# EAGLE board uBraids_SE_Assembly_Template (EAGLE 9.5.2)
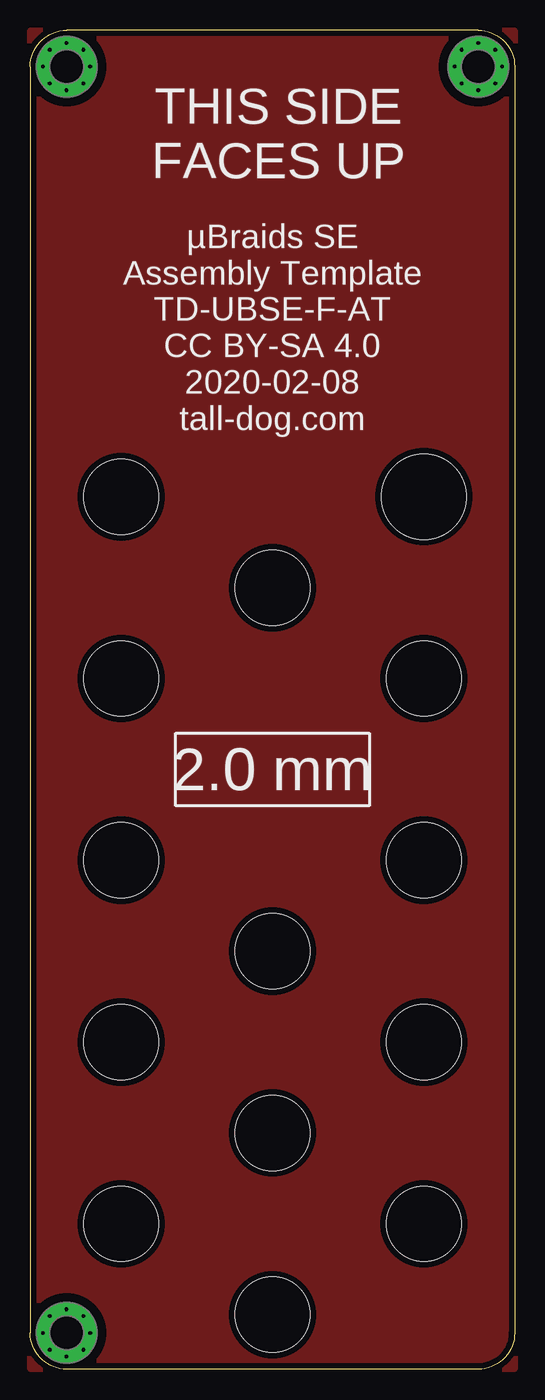
[diagram p0: board, top side]
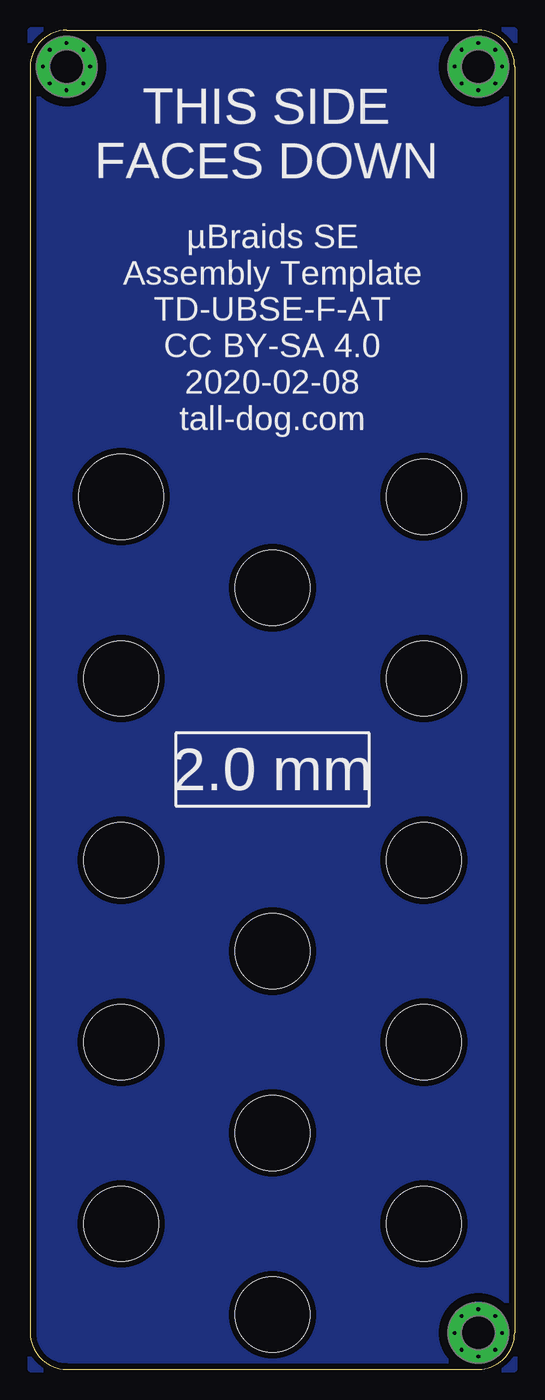
[diagram p1: board, bottom side, seen from below]

Size 40 x 110.5 mm. Coordinates in mm from the lower left corner, seen from the top.
Outline: 37,110.5 3,110.5 arc90 0,107.5 0,3 arc90 3,0 37,0 arc90 40,3 40,107.5 arc90 37,110.5
Copper layers (1*16): Top 0.035mm / dielectric 1.5mm / Bottom 0.035mm
Design rules "default *": minimum track width 10mil, minimum drill 0.25mm, track to track 8mil, track to pad 8mil, pad to pad 8mil, via to via 8mil, smd to smd 8mil, copper to edge 0.25mm, drill to drill 8mil, minimum pad ring 6mil, minimum via ring 6mil, stop-mask expansion 0mil, vias tented up to drill 0mil, thermal gap 10mil
Holes 6.2 mm at 7.5,72 7.5,57 7.5,42 7.5,27 7.5,12 20,64.5 32.5,57 32.5,42 20,34.5 32.5,27 20,19.5 32.5,12 20,4.5
Holes 7 mm at 32.5,72

## Footprints (pad centres in the part's own frame; a part is rotated, then mirrored left to right if it is on the bottom)
M2.5-HOLE = drill 2.75 pad 5: P$1 0,0 | drill 0.3: P$2 0,1.95; P$3 0,-1.95; P$4 -1.95,0; P$5 1.95,0; P$6 1.4,1.4; P$7 -1.4,1.4; P$8 -1.4,-1.4; P$9 1.4,-1.4

## Placement (x,y rotation side)
E$1  [M2.5-HOLE]  3,107.5 0 top
E$2  [M2.5-HOLE]  37,107.5 0 top
E$3  [M2.5-HOLE]  3,3 0 top

## Library data of the parts
E$1-E$3 = uBraids_SE_Library

## Tracks (layer width: path | path; a pad name or v marks a point on that pad's centre or on a via)
GND
  pour Top (isolate 0.5): 0,110.5 40,110.5 40,0 0,0
  pour Bottom (isolate 0.5): 0,110.5 40,110.5 40,0 0,0

## Text on the board
tPlace: THIS SIDE / FACES UP | µBraids SE / Assembly Template / TD-UBSE-F-AT / CC BY-SA 4.0 / 2020-02-08 / tall-dog.com | 2.0 mm
bPlace: THIS SIDE / FACES DOWN | µBraids SE / Assembly Template / TD-UBSE-F-AT / CC BY-SA 4.0 / 2020-02-08 / tall-dog.com | 2.0 mm